# Altium PCB TempRFIn.PcbDoc
Units mm, origin at the board's own origin, x right, y up, seen from the top; angles counter-clockwise.
Board outline 54 x 46 mm, 4 copper layers (Top Layer, Internal 1, Internal 2, Bottom Layer), stack 1.604 mm thick; 10 components, 14 nets, 58 pads, 3 vias.
Unrouted connection lines stored in the file: 2.
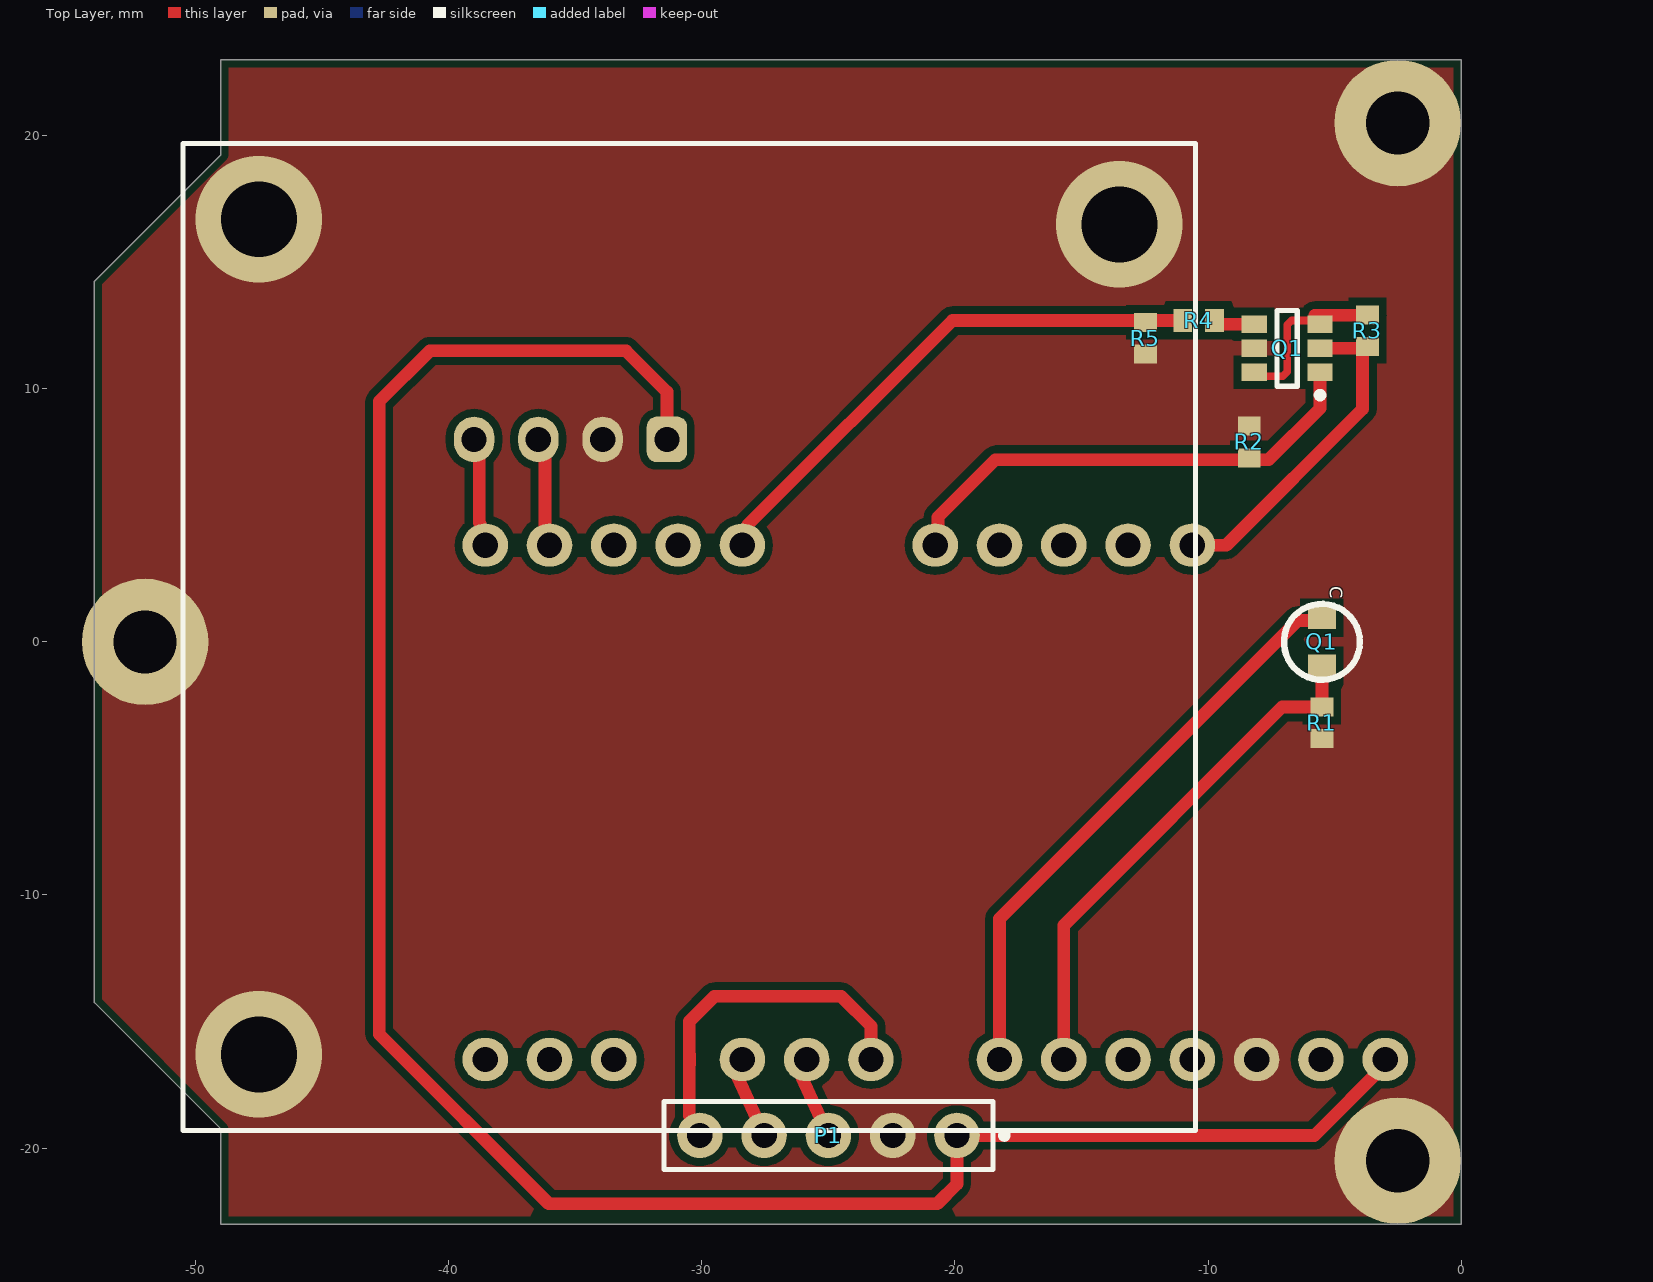
[diagram p0: Top Layer view]
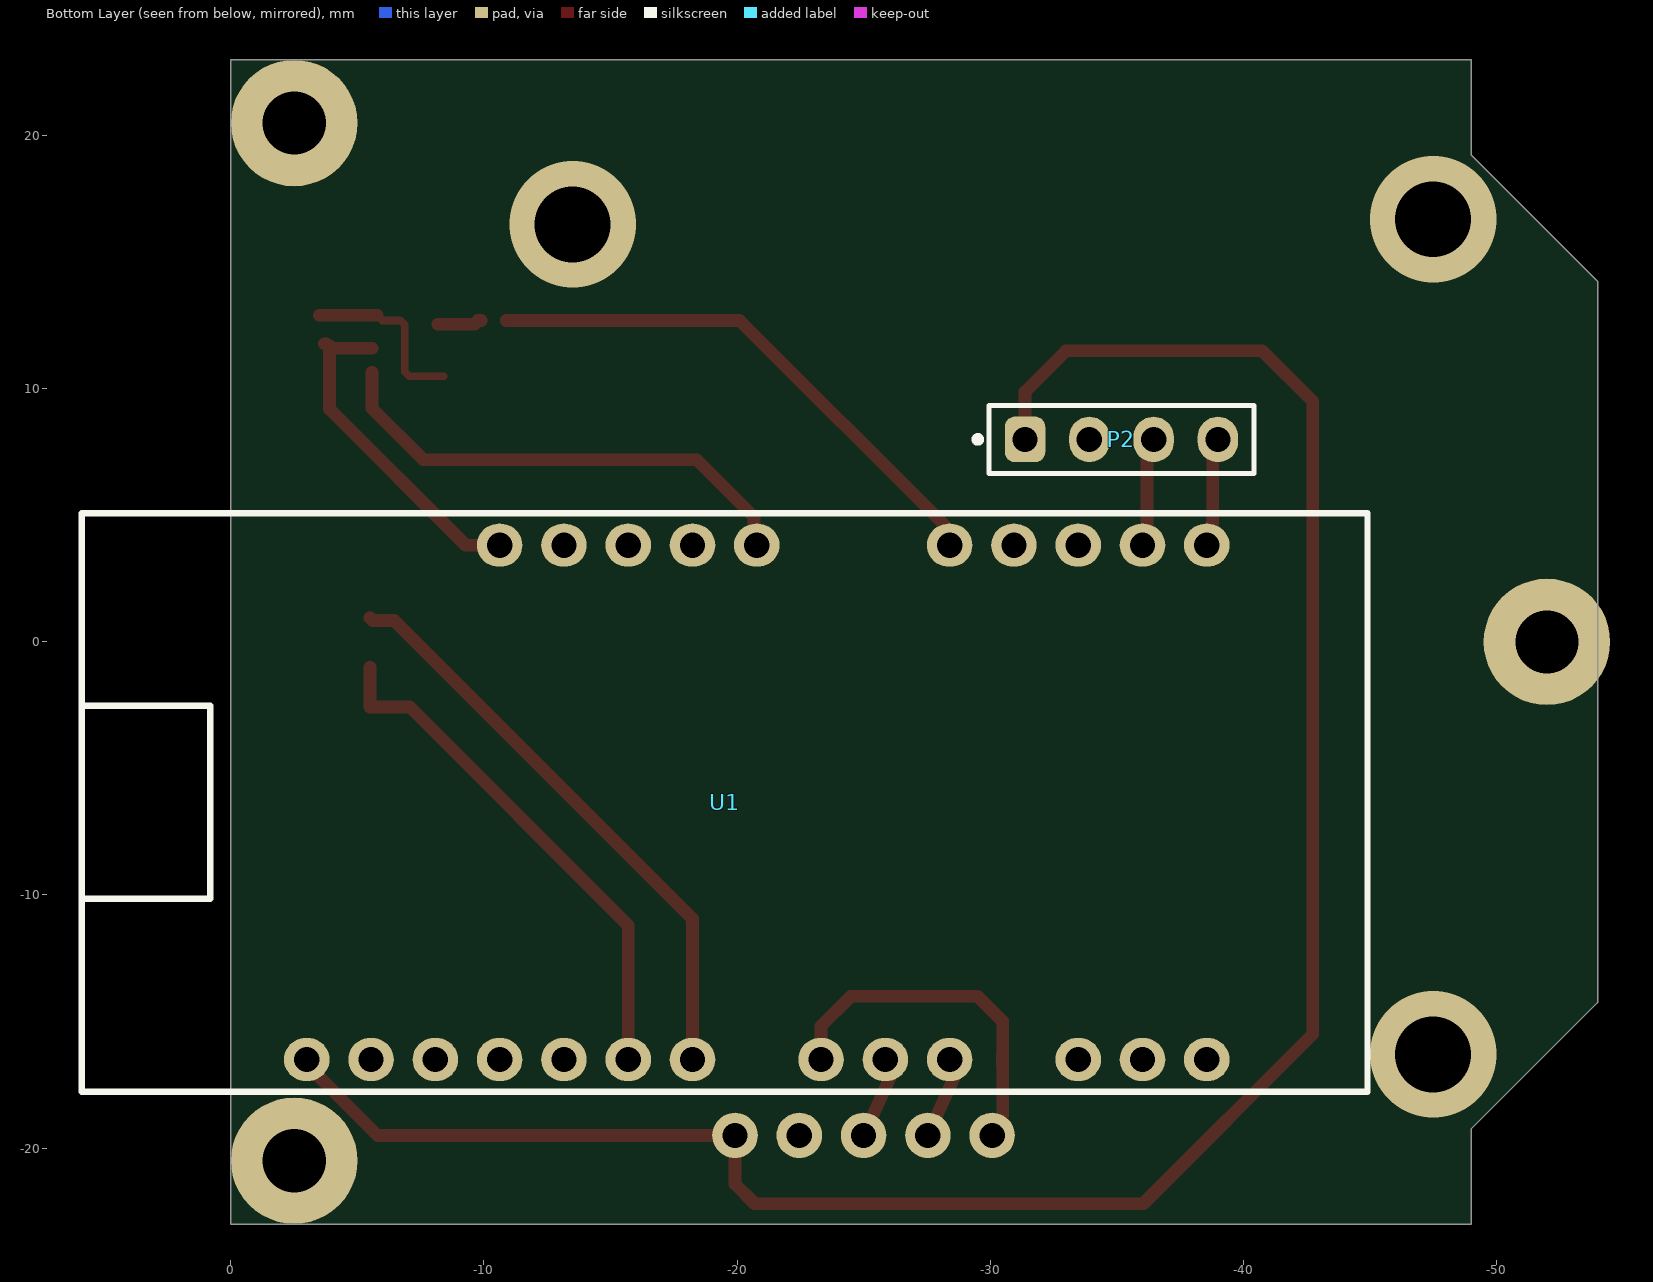
[diagram p1: Bottom Layer view, seen from below]

## Layer stack, top to bottom
Top Solder: solder mask 0.01, Solder Resist, Dk 3.5
Top Layer: signal copper 0.035
Dielectric 3: prepreg 0.075, PP-006, Dk 4.1
Internal 1: signal copper 0.017
Dielectric 1: dielectric 1.35, FR-4, Dk 4.8
Internal 2: signal copper 0.017
Dielectric 4: prepreg 0.075, PP-006, Dk 4.1
Bottom Layer: signal copper 0.035
Bottom Solder: solder mask 0.01, Solder Resist, Dk 3.5

## Board outline
-49,19.25 -54,14.25 -54,10 -54,-10 -54,-14.25 -49,-19.25 -49,-23 0,-23 0,23 -49,23

## Design rules (kind name [scope] priority, off if disabled: settings)
BoardOutlineClearance [All] p1: gap=0.3 ignorepadtopadclearanceinfootprint=FALSE
Clearance Clearance_3 [All] p1: gap=0.2 ignorepadtopadclearanceinfootprint=FALSE except(0.3: Arc-Fill Arc-Poly Arc-Region Track-Fill Track-Poly Track-Region SMDPad-Fill SMDPad-Poly SMDPad-Region THPad-Fill THPad-Poly THPad-Region Via-Fill Via-Poly Via-Region Fill-Fill Fill-Poly Fill-Region Poly-Poly Poly-Region Region-Region)
ComponentClearance [All] p1: gap=0.1 collisioncheckmode=3 verticalgap=0.254 showdistances=FALSE
DiffPairsRouting [All] p1: maxlimit=0.254 minlimit=0.152 mostfreqgap=0.254 toplayer_prefgap=0.2 toplayer_minwidth=0.152 toplayer_maxwidth=0.381 toplayer_prefwidth=0.152 midlayer1_mingap=0.254 midlayer1_minwidth=0.381 midlayer1_maxwidth=0.381 midlayer1_prefwidth=0.381 midlayer2_mingap=0.254 midlayer2_minwidth=0.381 midlayer2_maxwidth=0.381 midlayer2_prefwidth=0.381 bottomlayer_prefgap=0.2 bottomlayer_minwidth=0.152 bottomlayer_maxwidth=0.381 bottomlayer_prefwidth=0.152 maxuncoupledlength=12.7
HoleSize [All] p1: absolutevalues=TRUE maxlimit=5 minlimit=0.025 maxpercent=80.000 minpercent=20.000
MinimumSolderMaskSliver [All] p1 off: minsoldermaskwidth=0.254
PasteMaskExpansion [All] p1: expansion=-0.05
PlaneClearance [All] p1: clearance=0.5
PlaneConnect [All] p1: planeconnectstyle=Direct reliefexpansion=0.508 reliefentries=4 reliefconductorwidth=0.254 reliefairgap=0.254
PolygonConnect [All] p1: connectstyle=Direct reliefconductorwidth=0.5 reliefentries=4 polygonreliefangle="90 Angle" airgapwidth=0.2
RoutingVias [All] p1: holewidth=0.3 width=0.6 viastyle="Through Hole" minholewidth=0.3 minwidth=0.52 maxholewidth=5 maxwidth=5
SilkToSilkClearance [All] p1 off: silktosilkclearance=0.254
SilkToSolderMaskClearance [IsPad] p1 off: minsilkscreentomaskgap=0.254 clearancetoexposedcopper=TRUE
SolderMaskExpansion [All] p1 off: expansion=0.102 istentingtop=FALSE
SupplyNets "Schematic Supply Nets_3" [InNet('VBAT')] p1: voltage=0.000
SupplyNets "Schematic Supply Nets_1" [InNet('3V3')] p2: voltage=0.000
SupplyNets "Schematic Supply Nets" [InNet('GND')] p3: voltage=0.000
UnRoutedNet [All] p1: checkbadconnections=TRUE
Width [All] p1: maxlimit=5 minlimit=0.3 preferedwidth=0.5
20 further rules are at their usual default settings.

## Classes and differential pairs
component class TempRFIn: P1 P2 Q1 R1 R2 R3 R4 R5 U1

## Components (designator, comment, footprint, x,y, rotation, side; value= is the part's Value field where it differs from the comment)
P1 "61300511121" 61300511121 -25,-19.5 r180 top
P2 "61300411121" 61300411121 -35.19,8 r180 bottom
Q1 "SFH 3716" WL-STCW_0805 -5.5,0 r270 top
Q1 "DMC2700UDM-7" FAIR-SOT23-6_V -6.875,11.6 r180 top
R1 "120k" 0603 -5.5,-3.2 r90 top
R2 "120k" 0603 -8.375,7.9 r270 top
R3 "120k" 0603 -3.7,12.3 r270 top
R4 "15k" 0603 -10.375,12.7 r0 top
R5 "15k" 0603 -12.475,12 r90 top
U1 "Adafruit Feather" "Adafruit Feather" -19.51,-6.34 r90 bottom locked

## Footprints (in the part's own frame and the unit in brackets; to place one, negate y for a bottom-side part, rotate by r counter-clockwise, add the part's x,y. Pads: shape width x height; smd on the part's side, far side on the other; paste and mask are expansions set on the pad)
0603 [mm] "IPC High Density"
  rect 0.75x0.9 smd: 1(-0.625,0) 2(0.625,0)
  body extent -0.87,-0.48 0.87,0.48, height 0.92
61300411121 [mm] "Pin Header, pitch 2.54 mm, THT, Vertical, single row, 4p"
  rrect50% 1.6x1.8 hole 1: 1(-3.81,0)
  oval 1.6x1.8 hole 1: 2(-1.27,0) 3(1.27,0) 4(3.81,0)
  silkscreen extent -5.8,-1.35 5.23,1.35, body extent -5.08,-1.27 5.08,1.27, height 8.57
61300511121 [mm] "Pin Header, pitch 2.54 mm, THT, Vertical, single row, 5p"
  round 1.8 hole 1: 1(-5.08,0) 2(-2.54,0) 3(0,0) 4(2.54,0) 5(5.08,0)
  silkscreen extent -7.07,-1.35 6.5,1.35, body extent -6.35,-1.27 6.35,1.27, height 8.57
"Adafruit Feather" [mm]
  round 0 all layers, no hole: 1(-10.16,19.05) 9(-10.16,-1.27) 13(-10.16,-11.43) 22(10.16,-6.35) 23(10.16,-3.81)
  oval 1.7x1.8 hole 1: 2(-10.16,16.51) 3(-10.16,13.97) 4(-10.16,11.43) 5(-10.16,8.89) 6(-10.16,6.35) 7(-10.16,3.81) 8(-10.16,1.27) 10(-10.16,-3.81) 11(-10.16,-6.35) 12(-10.16,-8.89) 14(-10.16,-13.97) 15(-10.16,-16.51) 16(-10.16,-19.05) 17(10.16,-19.05) 18(10.16,-16.51) 19(10.16,-13.97) 20(10.16,-11.43) 21(10.16,-8.89) 24(10.16,-1.27) 25(10.16,1.27) 26(10.16,3.81) 27(10.16,6.35) 28(10.16,8.89)
  silkscreen extent -11.43,-25.4 11.43,25.4
FAIR-SOT23-6_V [mm] "SOT23, 6-Leads, Body 2.9x1.6mm, Pitch 0.95mm"
  rect 1x0.7 smd: 1(-1.3,0.95) 2(-1.3,0) 3(-1.3,-0.95) 4(1.3,-0.95) 5(1.3,0) 6(1.3,0.95)
  silkscreen extent -1.43,-1.5 0.4,1.97, body extent -1.4,-1.45 1.4,1.45, height 1.45
WL-STCW_0805 [mm] "SMT Phototransistor Chip Waterclear, body 2x1.3mm"
  rect 0.9x1.1 smd: 1(-0.95,0) 2(0.95,0)
  body extent -1,-0.65 1,0.65, height 0.8

## Part data
P1: library part CMP-1502-01068-4, "THT Vertical Pin Header WR-PHD, Pitch 2.54 mm, Single Row, 5 pins", Color=Black, Contact Resistance=20mΩ, Current Rating=3A, Max Operating Temperature=105°C, Min Operating Temperature=-40°C, Operating Supply Voltage=250V, Connector Type="Male Pin", Contact Material=Gold, Contact Mating Length=5.9944mm, Contact Plating=Gold, Gender=Male, Height=8.89mm, Lead Free="Lead Free", Lead Pitch=2.54mm, Mount="Through Hole", Number of Contacts=5, Number of Pins=5, Number of Positions=5, Number of Rows=1, Orientation=Vertical, Packaging=Bulk, Pitch=2.54mm, RoHS=Compliant, Termination=Solder, Voltage Rating=250V
P2: library part CMP-1502-01064-4, "THT Vertical Pin Header WR-PHD, Pitch 2.54 mm, Single Row, 4 pins", Color=Black, Contact Resistance=20mΩ, Current Rating=3A, Max Operating Temperature=105°C, Min Operating Temperature=-40°C, Operating Supply Voltage=250V, Connector Type="Male Pin", Contact Material=Gold, Contact Mating Length=5.9944mm, Contact Plating=Gold, Gender=Male, Height=8.89mm, Lead Free="Lead Free", Lead Pitch=2.54mm, Mount="Through Hole", Number of Contacts=4, Number of Pins=4, Number of Positions=4, Number of Rows=1, Orientation=Vertical, Packaging=Bulk, Pitch=2.54mm, RoHS=Compliant, Termination=Solder, Voltage Rating=250V
Q1: library part CMP-03913-108242142-2, "Phototransistor, 940Nm, 0805 Rohs Compliant: Yes", Max Collector Current=1mA, Max Operating Temperature=85°C, Min Operating Temperature=-40°C, Height=800µm, Length=2mm, RoHS=Compliant, Viewing Angle=130°, Width=1.3mm
Q1: library part CMP-2000-04939-1, "Dual N & P-Channel 2.5 V Specified PowerTrench(TM) MOSFET, -55 to 150 degC, 6-Pin SOT-23, RoHS, Tape and Reel", Manufacturer=Fairchild, Maximum Continuous Drain Current=2.7@NChannel, Maximum Drain Source Voltage=20V, Maximum Gate Source Voltage=±8V, Operating Temperature=-55to150degC, Package=6SuperSOT, Package Description="6-Pin Small Outline Transistor, Body 2.9 x 1.6 mm, Pitch 0.95 mm", Package Reference=SOT23-6, Package Version="Rev. 5, 05/2015", Category=MOSFET, Channel Mode=Enhancement, Channel Type=N, Datasheet URL=https://www.fairchildsemi.com/datasheets/FD/FDC6327C.pdf, Datasheet Version="Rev. E, 07/2000", Manufacturer URL=https://www.fairchildsemi.com/, Mounting=SurfaceMount, Package URL=https://www.fairchildsemi.com/package-drawings/MA/MA06A.pdf, Packaging=Tape&Reel, Rad Hard=No, RDS-on=80@4.5V@NChannel, Typical Fall Time=3@NChannel, Typical Rise Time=9@NChannel, Typical Turn-Off Delay Time=12@NChannel, Typical Turn-On Delay Time=5@NChannel
R1 R2 R3 R4 R5: library part R, "Resistor", ComponentLink1Description=http://www.yageo.com/documents/recent/PYu-RC_Group_51_RoHS_L_7.pdf, ComponentLink1URL=http://www.yageo.com/documents/recent/PYu-RC_Group_51_RoHS_L_7.pdf

## Free pads (board coordinates)
  round 5 hole 2.5: 11(-2.5,20.5) 12(-52,0) 13(-2.5,-20.5)

## Via types
v1: diameter 5, hole 3, Top Layer to Bottom Layer, 3 vias

## Nets (pads, with @x,y where several pads share a name; then routed paths per layer and width w, separated by ;. In a path a pad name is that pad's centre, name@x,y a point inside that pad or via, vN(x,y) a via of type N, cw(c..) or ccw(c..) an arc to the next point about the centre after c; other vN are vias at no path point)
3V3: P1.1 P2.1 U1.2 | length 85.5
  Top Layer w0.5: P2.1 -31.38,9.88 -33,11.5 -40.75,11.5 -42.75,9.5 -42.75,-15.5 -36.05,-22.2 -20.7,-22.2 -19.92,-21.42 P1.1 ; P1.1@-19.5,-19.5 -5.8,-19.5 -3,-16.7 U1.2
"9 A7": R4.1 R5.2 U1.21 | length 21.5
  Top Layer w0.5: U1.21 -28.209,4.011 -28.209,4.591 -20.1,12.7 R4.1@-10.875,12.7
"12 ENABLE": Q1.1@-5.575,10.65 R2.2 U1.24 | length 19.5
  Top Layer w0.5: U1.24 -20.669,3.931 -20.669,4.931 -18.4,7.2 -8.375,7.2 -7.6,7.2 -5.575,9.225 Q1.1@-5.575,10.65
A2: Q1.2@-5.5,-0.95 R1.2 U1.7 | length 20.6
  Top Layer w0.5: U1.7 -15.7,-11.2 -7.075,-2.575 R1.2 Q1.2@-5.5,-1
"A3 17": Q1.1@-5.5,0.95 U1.8 | length 23.2
  Top Layer w0.5: U1.8 -18.24,-10.94 -6.455,0.845 -5.605,0.845 Q1.1@-5.5,0.95
CLK: P1.3 U1.11 | length 3.3
  Top Layer w0.5: U1.11 -26.047,-17 -26.047,-17.199 P1.3
CS: P1.5 U1.10 | length 14.1
  Top Layer w0.5: P1.5 -30.08,-19.148 -30.5,-18.728 -30.5,-16.696 -30.49,-16.686 -30.49,-16.314 -30.5,-16.304 -30.5,-15 -29.5,-14 -24.5,-14 -23.32,-15.18 U1.10
DI: P1.4 U1.12 | length 3.3
  Top Layer w0.5: U1.12 -28.587,-17 -28.587,-17.199 P1.4
GND: P1.2 P2.2 pad.11 pad.12 pad.13 Q1.5 R1.1 R2.1 R5.1 U1.4
  other v1: -47.5,-16.3 -13.5,16.5 -47.5,16.7
NetQ1_3: Q1.3 Q1.6 R3.1 | length 7
  Top Layer w0.3: Q1.6@-8.402,10.5 -7.051,10.5 -6.875,10.676 -6.875,12.524 -6.699,12.7 -5.975,12.7 -5.775,12.9
  Top Layer w0.5: -5.775,12.9 R3.1@-3.5,12.9
NetQ1_4: Q1.4 R4.2 | length 1.8
  Top Layer w0.5: R4.2@-9.9,12.7 R4.2 -9.75,12.675 -9.625,12.55 Q1.4
SCL: P2.3 U1.18 | length 4.4
  Top Layer w0.5: P2.3 -36.46,7.702 -36.2,7.442 -36.2,4 U1.18
SDA: P2.4 U1.17 | length 4.4
  Top Layer w0.5: P2.4 -38.8,7.8 -38.8,4.713 -38.751,4.664 -38.751,4.011 U1.17
VBAT: Q1.2@-5.575,11.6 R3.2 U1.28 | length 13.4
  Top Layer w0.5: U1.28 -9.28,3.82 -3.9,9.2 R3.2@-3.9,11.7 ; Q1.2@-5.575,11.6 -3.95,11.6 -3.775,11.775 R3.2@-3.7,11.775
pads on no net: U1.1 U1.3 U1.5 U1.6 U1.9 U1.13 U1.14 U1.15 U1.16 U1.19 U1.20 U1.22 U1.23 U1.25 U1.26 U1.27

## Polygon pours and split planes (outlines as drawn)
GND on Top Layer "GND_L01_P000" (solid, remove dead copper, pour order 0): -55,23 10,23 10,-23.304 -55,-23.864

## Silkscreen, mask and mechanical layers (free items; w line width, h text height)
Top Overlay:
  circle w0.254: c-5.5,0 r1.5
  lines w0.2: -50.5,-19.3 -10.5,-19.3 -10.5,19.7 -50.5,19.7 -50.5,-19.3

## Text inside footprints (layer, text, board x,y; h text height)
Q1: Top Overlay "C" at -5.2,2.2 h0.5 r270